# EAGLE board RF_Front-End (EAGLE 5.07)
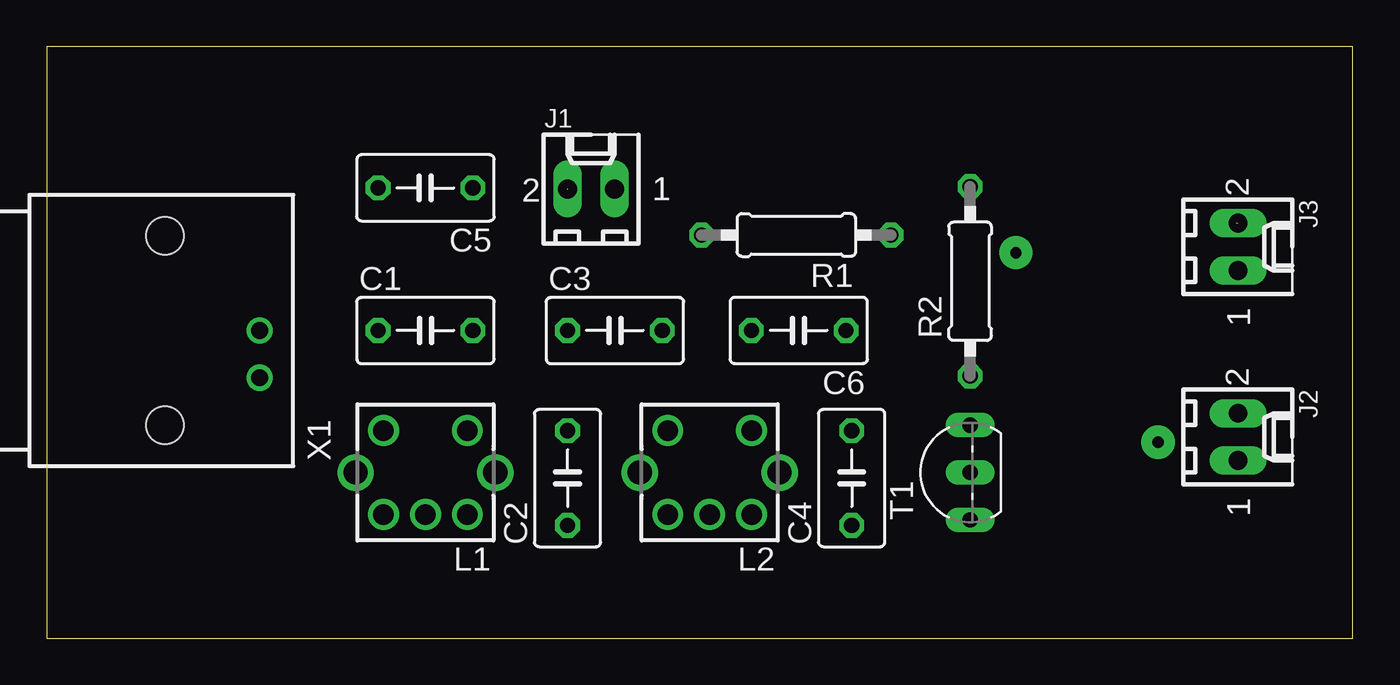
[diagram p0: board, top side]
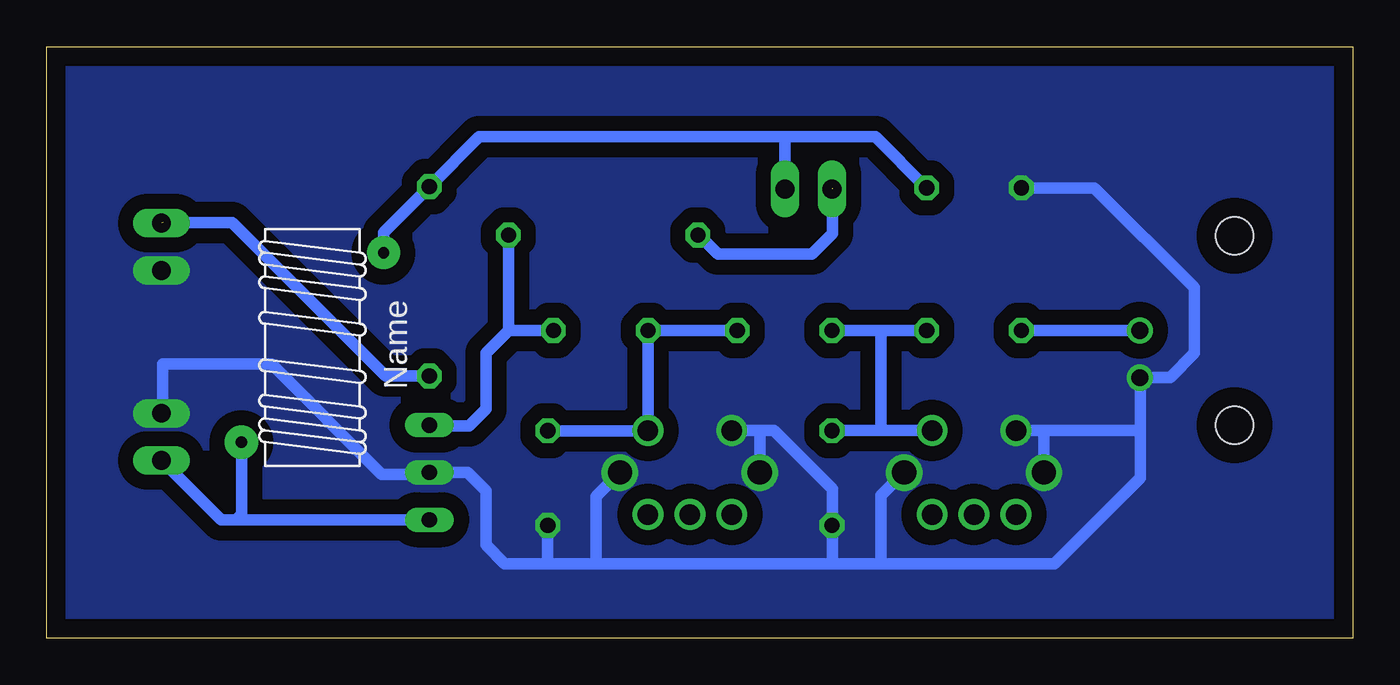
[diagram p1: board, bottom side, seen from below]

Size 70.06 x 31.74 mm. Coordinates in mm from the lower left corner, seen from the top.
Outline: 0,0 70.06,0 70.06,31.74 0,31.74 0,0
Copper layers (1*16): Top 0.035mm / dielectric 1.5mm / Bottom 0.035mm
Design rules "default *": minimum track width 10mil, minimum drill 24mil, track to track 8mil, track to pad 8mil, pad to pad 8mil, via to via 8mil, smd to smd 8mil, copper to edge 40mil, drill to drill 8mil, minimum pad ring 10mil, minimum via ring 8mil, stop-mask expansion 4mil, vias tented up to drill 0mil, thermal gap 10mil

## Footprints (pad centres in the part's own frame; a part is rotated, then mirrored left to right if it is on the bottom)
C050-035X075 = drill 0.813 octagon: 1 -2.54,0; 2 2.54,0
6410-02 = drill 1.016 long: 1 1.27,0; 2 -1.27,0
71K = drill 1.1 round: 1 -2.25,-2.25; 2 -2.25,2.25; 3 0,2.25; 4 2.25,2.25; 5 2.25,-2.25 | drill 1.3 round: S1 -3.75,0; S2 3.75,0
T50_INDUCTOR = drill 0.6 pad 1.778 round: CA -3.81,-5.08; CB 3.81,5.08
0207/10 = drill 0.813 octagon: 1 -5.08,0; 2 5.08,0
TO92-CEB = drill 0.813 long: B 2.54,0; C -2.54,0; E 0,0
AMP_227161 = drill 0.9 pad 1.27 round: 1 0,-5.08; 2 -2.54,-5.08 | hole 2: -5.08,0; 5.08,0

## Placement (x,y rotation side)
C1  22pF  [C050-035X075]  20.32,16.51 0 top
C2  100pF  [C050-035X075]  27.94,8.59 90 top
C3  22pF  [C050-035X075]  30.48,16.51 0 top
C4  100pF  [C050-035X075]  43.18,8.59 90 top
C5  0.01uF  [C050-035X075]  20.32,24.16 180 top
C6  22pF  [C050-035X075]  40.34,16.51 180 top
J1  [6410-02]  29.2,24.1 0 top
J2  [6410-02]  63.9,10.8 270 top
J3  [6410-02]  63.9,21 270 top
L1  [71K]  20.32,8.89 180 top
L2  [71K]  35.56,8.89 180 top
L3  T50_INDUCTOR  [T50_INDUCTOR]  55.8,15.6 180 bottom
R1  82k  [0207/10]  40.21,21.63 180 top
R2  100E  [0207/10]  49.53,19.15 90 top
T1  BF494  [TO92-CEB]  49.53,8.89 90 top
X1  ANT  [AMP_227161]  6.35,16.51 90 top

## Library data of the parts
C1-C6 R1 R2 = rcl
J1-J3 = con-molex
L1 L2 = inductor-neosid
L3 = toroid
T1 = transistor-neu-to92
X1 = con-coax

## Nets
GND: C2.1 C4.1 C5.2 J2.2 J3.1 L1.5 L1.S1 L1.S2 L2.5 L2.S1 L2.S2 T1.E X1.2
N$1: C1.1 X1.1
N$2: J2.1 L3.CB T1.C
N$3: C3.2 C4.2 C6.2 L2.1
N$4: J3.2 R2.1
N$6: C1.2 C2.2 C3.1 L1.1
N$8: J1.2 R1.2
N$9: C6.1 R1.1 T1.B
N$10: C5.1 J1.1 L3.CA R2.2

## Tracks (layer width: path | path; a pad name or v marks a point on that pad's centre or on a via)
GND
  Bottom 0.61: 25.3,4 25,4 16,4 11.4,8.6 11.4,11 | 25.3,4 28.1,4 | 28.1,4 40.6,4 | 40.6,4 43.1,4 | 43.1,4 45.5,4 46.5,5 46.5,7.9 47.49,8.89 T1.E 49.62,8.8 52.1,8.8 58,14.7 63.83,14.7 63.83,12.1 | 11.4,11 11.4,13.94 X1.2 11.4,14 9.8,14 8.5,15.3 8.5,18.8 13.86,24.16 C5.2 | 16.6,11.14 16.3,11.14 11.54,11.14 11.4,11 | 16.6,11.14 L1.5 | C4.1 43.18,4.08 43.1,4 | 31.8,11.14 31.04,11.14 27.9,8 | 31.8,11.14 L2.5 | 27.9,8 27.9,6.09 C2.1 | 27.9,8 27.9,4.2 28.1,4 | L2.S2 31.81,11.13 31.8,11.14 | L2.S1 40.6,7.6 40.6,4 | L1.S2 16.57,11.11 16.6,11.14 | L1.S1 25.3,7.66 25.3,4
  pour Bottom (isolate 0.813, no thermals): 0.3,31.4 69.6,31.4 69.6,0.3 0.3,0.3
N$1
  Bottom 0.61: X1.1 C1.1
N$2
  Bottom 0.61: T1.C 59.9,6.35 | 59.9,6.35 60.7,6.35 63.88,9.53 J2.1 | L3.CB 59.61,6.64 59.9,6.35
N$3
  Bottom 0.61: C3.2 C6.2 L2.1 C4.2
N$4  (1 unrouted)
  Bottom 0.61: R2.1 51.87,14.07 60.1,22.3 63.82,22.3
N$6
  Bottom 0.61: C1.2 C3.1 25.3,16.51 25.3,11.14 | C2.2 25.3,11.14 | L1.1 25.3,11.14
N$8  (1 unrouted)
  Bottom 0.61: R1.2 35.11,21.65 34.06,20.6 30.1,20.6 29,20.6 27.9,21.7 27.9,24.12
N$9
  Bottom 0.61: C6.1 45.29,16.51 | 45.29,16.51 46.5,15.3 46.5,12.3 47.4,11.4 49.5,11.4 T1.B | 45.29,16.51 R1.1
N$10
  Bottom 0.61: R2.2 49.49,24.19 | L3.CA 51.99,21.77 R2.2 | C5.1 25.6,26.9 30.5,26.9 | 30.5,26.9 46.4,26.9 46.86,26.9 R2.2 | 30.5,26.9 30.49,26.89 | J1.1 30.47,26.87 30.5,26.9